# EAGLE board v3.0_r2 (EAGLE 9.6.2)
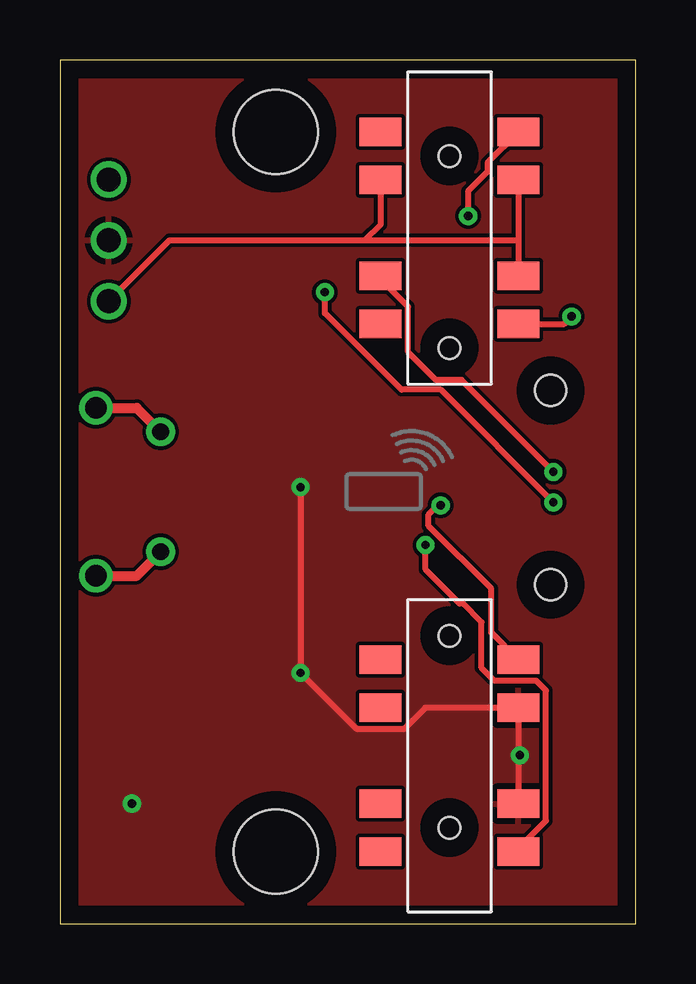
[diagram p0: board, top side]
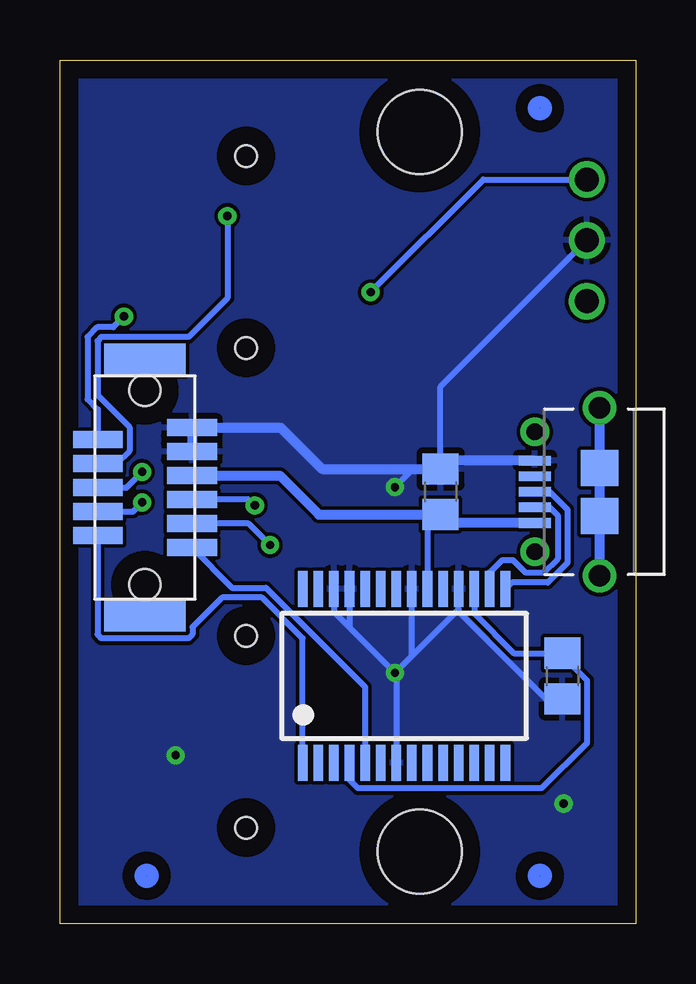
[diagram p1: board, bottom side, seen from below]

Size 24 x 36 mm. Coordinates in mm from the lower left corner, seen from the top.
Outline: 0,0 24,0 24,36 0,36 0,0
Copper layers (1*16): Top 0.035mm / dielectric 1.5mm / Bottom 0.035mm
Design rules "JLCPCB": minimum track width 6mil, minimum drill 0.3mm, track to track 6mil, track to pad 6mil, pad to pad 6mil, via to via 6mil, smd to smd 6mil, copper to edge 30mil, drill to drill 8mil, minimum pad ring 10mil, minimum via ring 8mil, stop-mask expansion 4mil, vias tented up to drill 0mil, thermal gap 10mil
Holes 3.5 mm at 9,3 9,33

## Footprints (pad centres in the part's own frame; a part is rotated, then mirrored left to right if it is on the bottom)
C0805 = smd 1.3 x 1.5: 1 -0.95,0; 2 0.95,0
SSOP28 = smd 0.4 x 1.5: 1 -4.225,-3.625; 2 -3.575,-3.625; 3 -2.925,-3.625; 4 -2.275,-3.625; 5 -1.625,-3.625; 6 -0.975,-3.625; 7 -0.325,-3.625; 8 0.325,-3.625; 9 0.975,-3.625; 10 1.625,-3.625; 11 2.275,-3.625; 12 2.925,-3.625; 13 3.575,-3.625; 14 4.225,-3.625; 15 4.225,3.625; 16 3.575,3.625; 17 2.925,3.625; 18 2.275,3.625; 19 1.625,3.625; 20 0.975,3.625; 21 0.325,3.625; 22 -0.325,3.625; 23 -0.975,3.625; 24 -1.625,3.625; 25 -2.275,3.625; 26 -2.925,3.625; 27 -3.575,3.625; 28 -4.225,3.625
DF9-11S-1V(32) = smd 0.7 x 2.08: 1 -2.5,-1.96; 2 -1.5,-1.96; 3 -0.5,-1.96; 4 0.5,-1.96; 5 1.5,-1.96; 6 2.5,-1.96; 7 2,1.96; 8 1,1.96; 9 0,1.96; 10 -1,1.96; 11 -2,1.96 | smd 1.3 x 3.4: S1 -5.35,0; S2 5.35,0 | hole 1.3: -4.05,0; 4.05,0
10118194-0001LF = smd 0.4 x 1.35: 1 -1.3,2.7; 2 -0.65,2.7; 3 0,2.7; 4 0.65,2.7; 5 1.3,2.7 | drill 0.7: S1 -2.5,2.7; S2 2.5,2.7 | drill 0.9: S3 -3.5,0; S6 3.5,0 | smd 1.5 x 1.55: S4 -1,0; S5 1,0
K3-2336S-F1 = smd 1.2 x 1.75: 1.1 -4,-2.875; 1.2 -2,-2.875; 1.3 2,-2.875; 1.4 4,-2.875; 2.1 -4,2.875; 2.2 -2,2.875; 2.3 2,2.875; 2.4 4,2.875 | hole 0.9: -3,0; 5,0
1X03_R_1 = drill 1: 1 -2.54,0; 2 0,0; 3 2.54,0

## Placement (x,y rotation side)
C1  100nF  [C0805]  8.13,18 90 bottom
C2  100nF  [C0805]  3.05,10.32 270 bottom
IC1  FT232RL  [SSOP28]  9.65,10.32 0 bottom
J1  BRICK-INTERF-V3_I-SIDE  [DF9-11S-1V(32)]  20.46,18.17 90 bottom
J2  10118194-0001LF  [10118194-0001LF]  1.5,18 90 bottom
S1  K3-2336S-F1  [K3-2336S-F1]  16.24,29 270 top
S2  K3-2336S-F1  [K3-2336S-F1]  16.24,7 90 top
U$1  [FIDUCIAL]  4,34 0 bottom
U$2  [FIDUCIAL]  4,2 0 bottom
U$3  [FIDUCIAL]  20.38,2 0 bottom
U$4  [BRICKS_LOGO_10]  8.4,15.4 0 top
UPDI  PINHD_1X03_R_1  [1X03_R_1]  2.03,28.48 90 top

## Library data of the parts
C1 C2 = rcl; SPICEPREFIX: C
IC1 = ftdichip; MPN: FT232RL; OC_FARNELL: 1146032; OC_NEWARK: 91K9918
J1 = no_brick_interface
J2 = no_reichelt; CREATED_BY: PCBLayout.com; DIGIKEY_PARTNO: 609-4618-2-ND; MANUFACTURER: Amphenol ICC (FCI); MPN: 10118194-0001LF
S1 S2 U$1-U$3 = no_reichelt
U$4 = no_images
UPDI = no_pinhd; DRILL: 1mm; PADSHAPE: round

## Nets
+3V3: J1.10 UPDI.3
+5V: C1.1 IC1.20 J1.4 J2.1
D+: IC1.15 J2.3
D-: IC1.16 J2.2
GND: C1.2 C2.2 IC1.7 IC1.18 IC1.21 IC1.25 IC1.26 J1.5 J1.6 J2.5 S2.1.2 S2.1.3 UPDI.2
N$1: C2.1 IC1.4 IC1.17
PROG: J1.3 S2.1.4
RXD: IC1.5 J1.1
SETUP: J1.2 S2.1.1
SHIELD: J2.S1 J2.S2 J2.S3 J2.S4 J2.S5 J2.S6
TXD: IC1.1 J1.11
UPDI: S1.1.2 S1.2.2 S1.2.3 UPDI.1
UPDI1: J1.7 S1.2.4
UPDI2: J1.8 S1.2.1
UPDI3: J1.9 S1.1.3

## Tracks (layer width: path | path; a pad name or v marks a point on that pad's centre or on a via)
+3V3  (via drill 0.35)
  Top 0.254: v20.57,17.56 15.88,22.25 14.24,22.25 11.06,25.43 11.05,25.43 v11.05,26.32
  Bottom 0.254: J1.10 20.96,17.17 v20.57,17.56 | v11.05,26.32 6.35,31.02 UPDI.3
+5V
  Bottom 0.254: IC1.20 8.68,16.5 C1.1
  Bottom 0.406: J2.1 7.78,16.7 C1.1 13.21,17.05 14.83,18.67 J1.4
D+
  Bottom 0.254: IC1.15 5.16,14.21 3.67,14.21 2.84,15.04 2.84,17.26 3.58,18 J2.3
D-
  Bottom 0.254: IC1.16 6.08,14.64 5.57,15.14 5.09,15.14 4.57,14.62 3.83,14.62 3.25,15.21 3.25,17.02 3.58,17.35 J2.2
GND  (via drill 0.35)
  Top 0.254: S2.1.2 S2.1.3 15.23,9 14.36,8.12 12.36,8.12 v10.03,10.45 v10.03,18.19
  Bottom 0.254: UPDI.2 8.13,22.38 C1.2 9.28,18.95 v10.03,18.19 | v10.03,10.45 11.93,12.34 | 11.93,12.34 12.58,12.99 IC1.26 | IC1.25 11.93,12.34 | v10.03,10.45 7.43,13.05 | 7.43,13.05 7.38,13.1 IC1.18 | v10.03,10.45 9.33,11.15 IC1.21 | v10.03,10.45 9.98,10.39 IC1.7 | C2.2 3.75,9.37 7.43,13.05
  Bottom 0.406: J2.5 7.78,19.3 C1.2 13.08,18.95 14.8,20.67 J1.6 J1.5
  other vias: 19.18,7.02 3,5
  pour Bottom: 0,0 24,0 24,36 0,36
  pour Top: 0,0 24,0 24,36 0,36
N$1
  Bottom 0.254: IC1.17 6.73,12.92 5.07,11.27 C2.1 3.05,11.16 2.02,10.13 2.02,7.54 3.92,5.64 11.58,5.64 11.93,5.99 IC1.4
PROG  (via drill 0.35)
  Top 0.254: S2.1.4 17.98,12.13 17.98,13.96 15.37,16.58 15.37,17.05 15.75,17.43 v15.88,17.43
  Bottom 0.254: v15.88,17.43 16.12,17.67 J1.3
RXD
  Bottom 0.254: IC1.5 11.28,9.87 15.41,14 16.82,14 J1.1
SETUP  (via drill 0.35)
  Top 0.254: S2.1.1 19.11,3.13 20.27,4.28 20.27,9.72 19.86,10.12 18.12,10.12 17.58,10.67 17.58,12.55 16.8,13.34 16.66,13.34 15.24,14.76 v15.24,15.78
  Bottom 0.254: v15.24,15.78 16.13,16.67 J1.2
SHIELD
  Top 0.406: J2.S6 3.2,21.5 J2.S2 | J2.S3 3.2,14.5 J2.S1
  Bottom 0.406: J2.S3 J2.S4 J2.S5 J2.S6
TXD
  Bottom 0.254: IC1.1 13.88,11.89 15.58,13.59 17.24,13.59 18.48,12.36 18.48,12.06 18.64,11.89 22.27,11.89 22.44,12.06 22.44,16.16 J1.11
UPDI
  Top 0.254: S1.2.2 19.11,28.48 | 19.11,28.48 S1.2.3 | UPDI.1 4.57,28.48 12.7,28.48 | 12.7,28.48 19.11,28.48 | S1.1.2 13.37,29.14 12.7,28.48
UPDI1  (via drill 0.35)
  Top 0.254: S1.2.4 21.03,25 v21.34,25.3
  Bottom 0.254: v21.34,25.3 21.78,24.86 22.44,24.86 22.84,24.46 22.84,21.86 22.42,21.43 J1.7
UPDI2  (via drill 0.35)
  Top 0.254: S1.2.1 17.83,31.72 17.83,31.34 17.02,30.52 v17.02,29.5
  Bottom 0.254: J1.8 21.63,19.17 21.1,19.71 21.1,20.69 22.44,22.03 22.44,24.29 22.27,24.45 18.64,24.45 17.02,26.08 v17.02,29.5
UPDI3  (via drill 0.35)
  Top 0.254: v20.57,18.83 16.74,22.66 15.69,22.66 14.52,23.83 14.52,25.72 13.37,26.87 S1.1.3
  Bottom 0.254: J1.9 21.23,18.17 v20.57,18.83

## Text on the board
tDocu: U2 | + | by NiJO's | U3 | - | U | U1 | NAHS-Brick-Interface | P | B | v3.0 R2 | S
bDocu: + | - | U